# Altium PCB PCB-CL_BB_01.PcbDoc
Units mil, origin at the board's own origin, x right, y up, seen from the top; angles counter-clockwise.
Board outline 3925 x 2245 mil, 2 copper layers (Top Layer, Bottom Layer), stack 42.17 mil thick; 49 components, 23 nets, 122 pads, 40 vias.
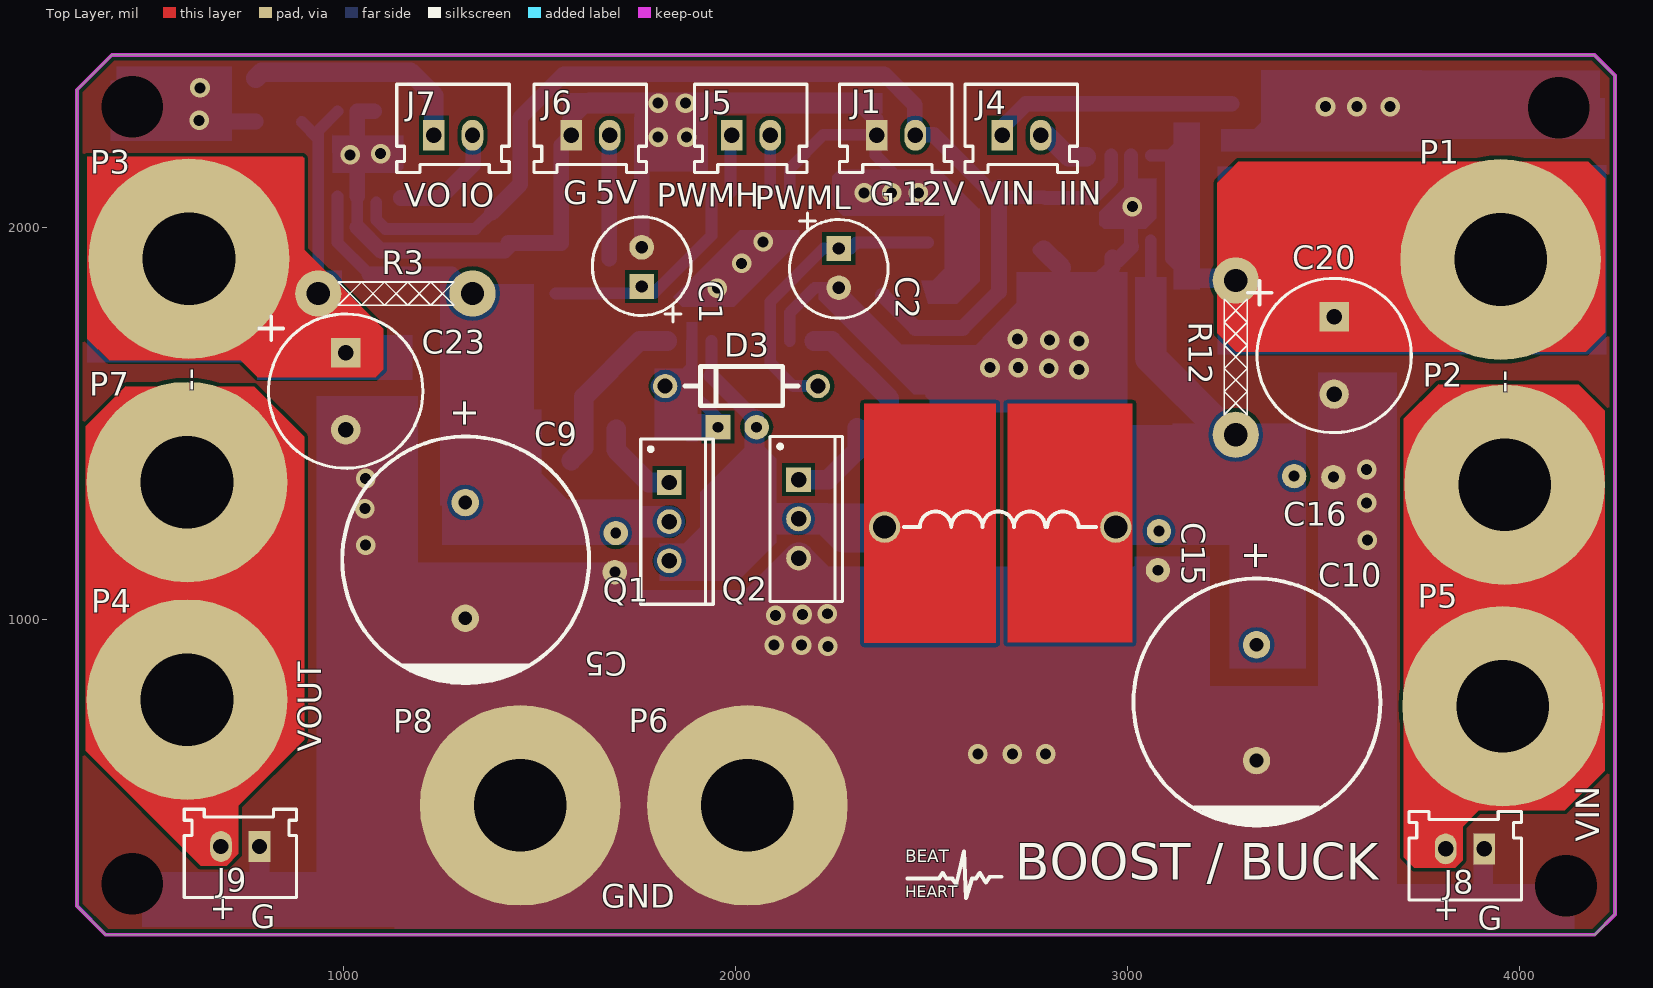
[diagram p0: Top Layer view]
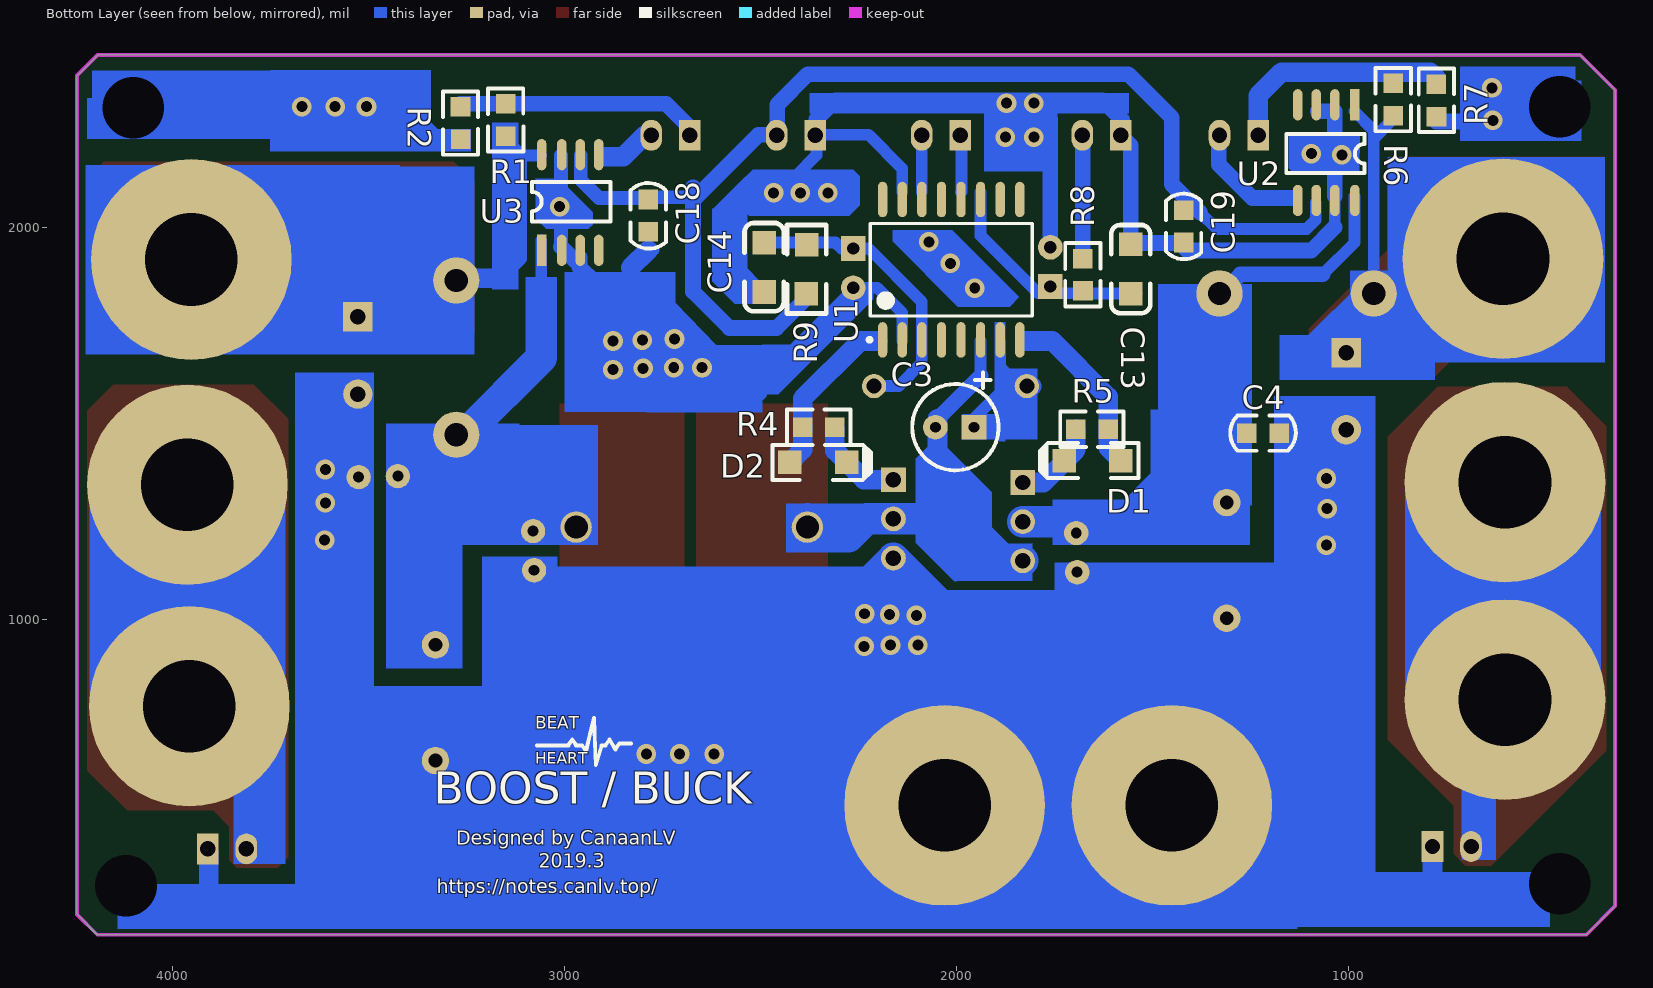
[diagram p1: Bottom Layer view, seen from below]
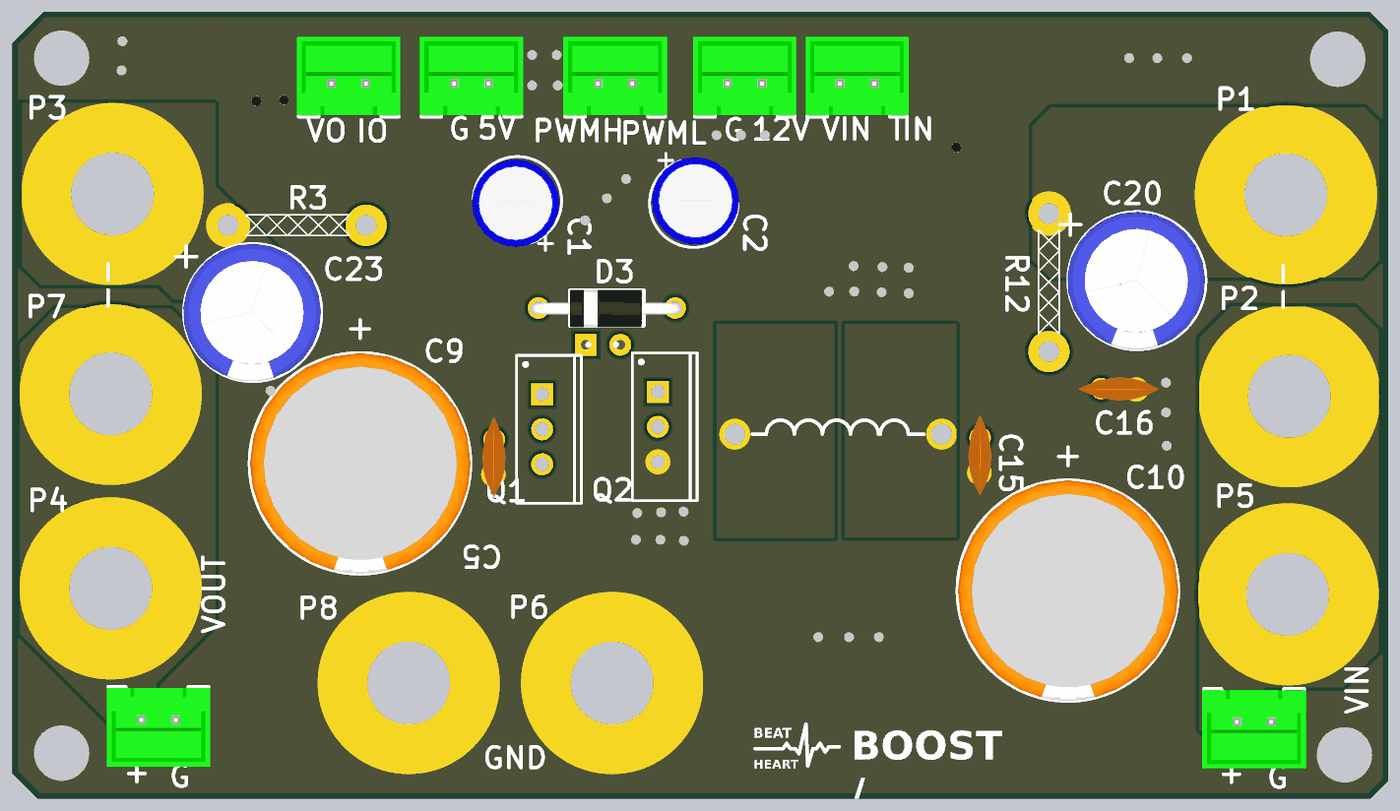
[diagram p2: 3D render of the assembled board from above, using the file's embedded part models]
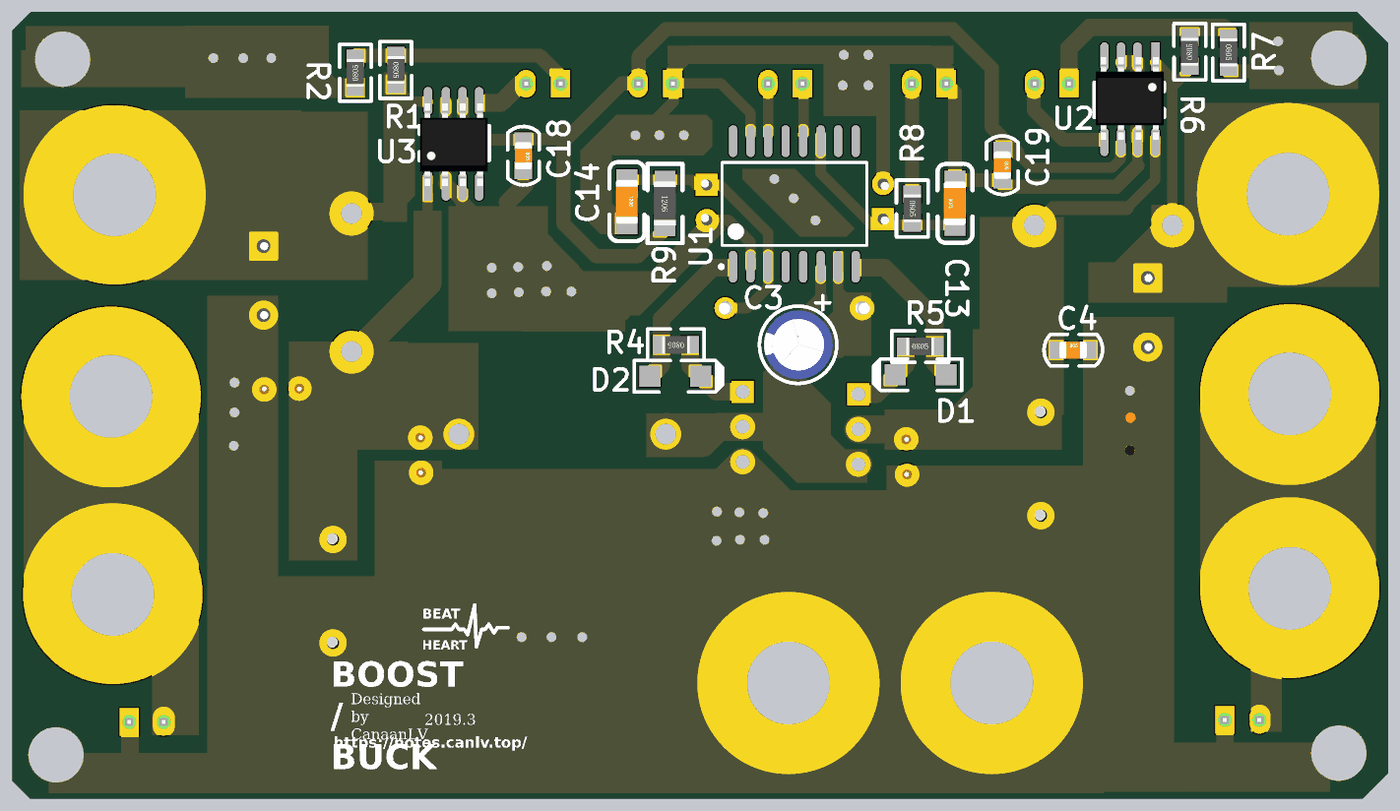
[diagram p3: 3D render of the assembled board from below, using the file's embedded part models]

## Layer stack, top to bottom
Top Solder: solder mask 0.4, Solder Resist, Dk 3.5
Top Layer: signal copper 1.4
Dielectric 1: dielectric 39.3701, FR-4, Dk 4.8
Bottom Layer: signal copper 1.4
Bottom Solder: solder mask 0.4, Solder Resist, Dk 3.5

## Board outline
319,268 392,195 4192,195 4244,247 4244,2387 4191,2440 408,2440 319,2351

## Design rules (kind name [scope] priority, off if disabled: settings)
Clearance [All] p1: gap=10
PlaneConnect [All] p1: planeconnectstyle=Direct reliefexpansion=20 reliefentries=4 reliefconductorwidth=10 reliefairgap=10
PolygonConnect [All] p1: connectstyle=Direct reliefconductorwidth=10 reliefentries=4 polygonreliefangle="90 Angle" airgapwidth=10
RoomDefinition Sheet-CL_BB_01 [InComponentClass('Sheet2')] p1: confinementstyle=ConfineIn formatcopy=TRUE lockcomponents=FALSE outline 283,160 4268,160 4268,2465 283,2465
RoutingVias [All] p1: holewidth=28 width=50 viastyle="Through Hole" minholewidth=28 minwidth=50 maxholewidth=28 maxwidth=50
SolderMaskExpansion [All] p1: expansion=4
Width [All] p1: maxlimit=1000 minlimit=10 preferedwidth=50
29 further rules are at their usual default settings.

## Components (designator, comment, footprint, x,y, rotation, side; value= is the part's Value field where it differs from the comment)
C1 "100uF" CZ0.65/25V100U 1760,1899 r90 top
C2 "100uF" CZ0.65/25V100U 2263,1896 r270 top
C3 "10uF" CZ0.50/25V4.7U 1955,1490 r180 bottom
C4 "uF" C0805 1265,1475 r180 bottom
C5 "uF" C0.254 1694,1170 r270 top
C9 "uF" CZ16X25 1310,1150 r90 top
C10 "uF" CZ16X25 3329,787 r90 top
C13 "0.1uF" C1206 1555,1831 r90 bottom
C14 "0.1uF" C1206 2490.54,1961 r270 bottom
C15 "uF" C0.254 3080,1175 r270 top
C16 "uF" C0.254 3475,1365 r0 top
C18 "0.1uF" C0805 2786,2077 r270 bottom
C19 "0.1uF" C0805 1420,2050 r270 bottom
C20 "470uF" CZ1.00/35V470uF 3527,1673 r180 top
C23 "470uF" CZ1.00/35V470uF 1005,1582 r180 top
D1 "0805D" 0805D 1650,1405 r0 bottom
D2 "0805D" 0805D 2355,1400 r180 bottom
D3 "DO-41" DO-41-2 2015,1595 r180 top
J1 "SIP-2" 2.54XH接插件2P 2360,2235 r0 top
J4 "SIP-2" 2.54XH接插件2P 2680,2235 r0 top
J5 "SIP-2" 2.54XH接插件2P 1990,2235 r0 top
J6 "SIP-2" 2.54XH接插件2P 1580,2235 r0 top
J7 "SIP-2" 2.54XH接插件2P 1230,2235 r0 top
J8 "SIP-2" 2.54XH接插件2P 3910,414 r180 top
J9 "SIP-2" 2.54XH接插件2P 785,420 r180 top
P1 "电流检测点" 接头孔6妈妈 3952,1918 r0 top
P2 "电流检测点" 接头孔6妈妈 3962,1343 r0 top
P3 "电流检测点" 接头孔6妈妈 605,1920 r0 top
P4 "电流检测点" 接头孔6妈妈 600,795 r0 top
P5 "输入正" 接头孔6妈妈 3957,778 r0 top
P6 "输入地" 接头孔6妈妈 2030,525 r0 top
P7 "输出正" 接头孔6妈妈 600,1350 r0 top
P8 "输出地" 接头孔6妈妈 1450,525 r0 top
Q1 "IRF540N" TO-220AB 1830.51,1248.98 r270 top
Q2 "IRF540N" TO-220AB 2160.51,1255.98 r270 top
R1 "R贴片电阻" R0805 3150,2315 r270 bottom
R2 "R贴片电阻" R0805 3265,2225 r90 bottom
R3 "20m" RES10 1301,1831 r180 top
R4 "R贴片电阻" R0805 2310,1490 r0 bottom
R5 "R贴片电阻" R0805 1695,1485 r180 bottom
R6 "R贴片电阻" R0805 885,2285 r90 bottom
R7 "R贴片电阻" R0805 775,2365 r270 bottom
R8 "R贴片电阻" R0805 1677,1920 r270 bottom
R9 "R贴片电阻" R1206 2385,1885 r270 bottom
R12 "20m" RES10 3276,1837 r270 top
U1 "IR2110S" SOIC16_N 2013,1892 r90 bottom
U2 "INA282" SO-8N 1058,2188 r270 bottom
U3 "INA282" SO-8N 2983,2066 r90 bottom
? "L" L_15mm 2380,1235 r0 top

## Footprints (in the part's own frame and the unit in brackets; to place one, negate y for a bottom-side part, rotate by r counter-clockwise, add the part's x,y. Pads: shape width x height; smd on the part's side, far side on the other; paste and mask are expansions set on the pad)
2.54XH接插件2P [mm]
  rect 1.4x2 hole 1: 1(0,0)
  oval 1.4x2 hole 1: 2(2.5,0)
  silkscreen extent -2.41,-2.41 4.88,3.3, body extent -2.51,-2.3 4.99,3.4, height 7
0805D [mil]
  rect 60x60 smd: A(-70,0) K(75,0)
  silkscreen extent -114,-45 137,45, body extent -60,-29 70,30, height 39
C0.254 [mil]
  round 62 hole 28: 1(-50,0) 2(50,-2.5)
  body extent -115,-34 115,33, height 233
C0805 [mil]
  rect 50x50 smd: 1(6,0) 2(88.7,-0.1)
  silkscreen extent -36,-45 131,45, body extent 8,-25 87,25, height 30
C1206 [mil] "3216/A型"
  rect 60x60 smd: 1(0,0) 2(126,0)
  silkscreen extent -50,-50 175,50, body extent 0,-31 126,32, height 39
CZ0.50/25V4.7U [mm]
  rect 1.6x1.6 hole 0.7: 1(0,0)
  round 1.6 hole 0.7: 2(-2.5,0)
  silkscreen extent -4,-2.8 1.6,3.56, body extent -3.68,-2.5 1.32,2.5, height 7.3
CZ0.65/25V100U [mm]
  rect 1.6x1.6 hole 0.8: 1(-1.27,0)
  round 1.6 hole 0.8: 2(1.27,0)
  silkscreen extent -3.56,-3.2 3.25,3.2, body extent -3.3,-3.05 3.05,3.3, height 13.03
CZ1.00/35V470uF [mm]
  rect 1.905x1.905 hole 1: 1(0,-2.5)
  round 1.905 hole 1: 2(0,2.5)
  silkscreen extent -5,-5 5.59,5, body extent -4.95,-5 5.03,5, height 16.8
CZ16X25 [mil]
  round 70 hole 35: 1(147.64,0) 2(-147.64,0)
  silkscreen extent -313,-316 316,314, body extent -313,-317 317,313, height 984
DO-41-2 [mil]
  round 62 hole 38: A(-195,0) K(195,0)
  silkscreen extent -145,-50 145,50, body extent -215,-52 219,55, height 107
L_15mm [mil] "12.7mm"
  round 80 hole 59.06: 1(0,0) 2(590,0)
  silkscreen extent 50,0 540,40
R0805 [mil] "1/8W"
  rect 50x50 smd: 1(0,0) 2(82.3,0.2)
  silkscreen extent -40,-45 122,45, body extent 1,-24 80,25, height 22
R1206 [mil] "1/4W"
  rect 60x60 smd: 1(-71,3) 2(55,2)
  silkscreen extent -121,-47 105,53, body extent -71,-29 55,33, height 24
RES10 [mm]
  round 3 hole 1.5: 1(-0.7,0) 2(9.3,0)
  silkscreen extent 0.51,-0.75 8.01,0.75, body extent -2.06,-1.02 10.69,0.98, height 16
SO-8N [mil]
  rect 80x24 smd: 1(-124.68,75)
  oval 80x24 smd: 2(-124.68,23.82) 3(-124.68,-23.42) 4(-124.68,-70.67) 5(119.41,-70.67) 6(119.41,-23.42) 7(119.41,23.82) 8(119.41,75)
  silkscreen extent -51,-100 49,100, body extent -123,-95 113,98, height 63
SOIC16_N [mm] "SOIC, 16-Leads, Body 10.3x7.5mm, Pitch 1.27mm, IPC Medium Density"
  oval 2.3x0.6 smd: 1(-4.55,4.445) 2(-4.55,3.175) 3(-4.55,1.905) 4(-4.55,0.635) 5(-4.55,-0.635) 6(-4.55,-1.905) 7(-4.55,-3.175) 8(-4.55,-4.445) 9(4.55,-4.445) 10(4.55,-3.175) 11(4.55,-1.905) 12(4.55,-0.635) 13(4.55,0.635) 14(4.55,1.905) 15(4.55,3.175) 16(4.55,4.445)
  silkscreen extent -4.67,-5.25 3,5.42, body extent -3.75,-5.15 3.75,5.15, height 2.65
TO-220AB [mm] "TO, Thru-Hole, Vertical, Heatsink Mounted; 3 In-Line Leads; Pitch 2.54 mm"
  rect 1.6x1.6 hole 1: 1(-2.54,0)
  round 1.6 hole 1: 2(0,0) 3(2.54,0)
  silkscreen extent -5.35,-1.85 5.35,2.85, body extent -5.4,-1.9 5.4,2.9, height 19.3
接头孔6妈妈 [mm]
  round 13 hole 6: 1(0,0)

## Part data
C1 C2 C3 C9 C10 C20 C23: library part C直插电容
C4 C13 C14 C18 C19: library part C贴片电容
C5 C15 C16: library part C直插无极性
P1 P2 P3 P4 P5 P6 P7 P8: library part SIP1, "Variable Resistor"
Q1 Q2: "HEXFET Power MOSFET"
R3 R12: library part R直插电阻
U1: "High and Low Side Driver"

## Free pads (board coordinates)
  round 0 hole 157.48: 6(4119,320) 7(4100,2305) 8(460,2308) 9(460,325)

## Via types
v1: diameter 50, hole 28, Top Layer to Bottom Layer, tented both sides, 40 vias

## Nets (pads, with @x,y where several pads share a name; then routed paths per layer and width w, separated by ;. In a path a pad name is that pad's centre, name@x,y a point inside that pad or via, vN(x,y) a via of type N, cw(c..) or ccw(c..) an arc to the next point about the centre after c; other vN are vias at no path point)
GND: C1.2 C2.2 C4.2 C5.2 C9.2 C10.2 C13.2 C14.2 C15.2 C16.2 C18.2 C19.2 C20.2 C23.2 J1.1 J6.1 J8.1 J9.1 P6.1 P8.1 pad.6 pad.7 pad.8 pad.9 Q2.3 R2.1 R7.2 U1.2 U1.15 U2.2 U2.3 U2.7 U3.2 U3.3 U3.7 | length 11279.8
  Bottom Layer w30: 1034.39,2000.61 U2.7@1034.39,2079.47 ; U1.2@2138,1710 U1.2 2138,1782 2202,1846 C2.2 ; U1.15@2138,2090 2138,2150 2224,2236 2357,2236 2357,2184 2409,2132 ; 2497.57,1575 2583,1575 2869,1861 2831,1861 ; C14.2@2502,1828 C14.2@2502,1840 ; 2621,1119 2625,1115 ; 2773,1942 2786,1942
  Bottom Layer w35: U3.2@3008.61,1950.61 U3.7@3008.61,2183.53
  Bottom Layer w40: 450,2245 475,2270 R7.2@775,2270 ; 585,320 785,320 1345,320 1710,685 ; 1034.39,2000.61 1094,1941 1411,1941 C19.2@1420,1950 ; U2.7@1034.39,2079.47 1034.39,2296 U2.3@1077,2296 ; C19.2@1420,1960 1555,1960 1555,2209 1577,2231 1577,2274 1627,2324 v1@1807,2324 ; C1.2 1760,2277 v1@1807,2324 ; J1.1@2357,2236 2357,2276 2309,2324 v1@1807,2324 ; 2831,1861 2924,1861 2961.5,1898.5 U3.3@2961.5,1923.5 ; U3.3@2971.5,1913.5 U3.2@3008.61,1950.61 ; R2.1 3325,2225 3380,2280
  Bottom Layer w50: 785,320 J9.1@785,415 ; C5.2@1685,1110 1385,1110 1385,1010 1710,685 ; P6.1@2200,690 2405,485 3120,485 3305,300 3715,300 ; 2786,1942 2831,1897 ; 3705,290 4085,290 ; J8.1@3908,405 3908,292 3910,290
  Bottom Layer w80: 1710,685 1710,705.46 Q2.3 ; 2160.51,965.51 Q2.3 ; P6.1@2200,690 2271.49,761.49 ; 3035,865 2375,865 2271.49,761.49 ; Q2.3 2271.49,1045 2271.49,761.49
  other v1: 2618,656 2706,656 2791,656 2235,931 2098,934 2168,934 2102,1010 2170,1012 2234,1014 1056,1189 3612,1202 1054,1282 3610,1297 1056,1359 3610,1382 2876,1637 2799,1640 2649,1642 2721,1642 2876,1710 2801,1712 2719,1715 1953,1845 2015,1908 2070,1963 3012,2053 2328,2088 2398,2088 2466,2088 1016,2185 1094,2188 1802,2230 1875,2230 631,2273 3505,2308 3585,2308 3670,2308 1802,2317 1872,2317 633,2356
IIN_TEST: J4.2 U3.5 | length 122.8
  Bottom Layer w50: J4.2@2795,2235 2850,2180 2895,2180
IOUT_TEST: J7.2 U2.5 | length 290.2
  Bottom Layer w40: 1145,2075 1245,2075 1330,2160 J7.2@1330,2230
Net_2: ?.2 C10.1 C15.1 C16.1 R12.2 U3.1 | length 774.8
  Bottom Layer w30: 3059,1720 U3.1@3059,1967
  Bottom Layer w80: ?.2@2975,1250 3180,1250 ; 3059,1720 3059,1667.3 R12.2@3250,1476.3
NetC1_1: C1.1 C13.1 R8.2 U1.11 | length 570.6
  Bottom Layer w30: C13.1@1540,1831 1659,1831 1660,1832 1791.42,1832 1938,1978.58 U1.11@1938,2090
NetC2_1: C2.1 C14.1 D3.A R9.1 U1.3 | length 776.4
  Bottom Layer w30: D3.A@2218.91,1595 2147,1595 2088,1654 2088,1810 2224,1946 2293.43,1946 2308.43,1961 C14.1
NetC3_1: C3.1 D3.K U1.7 | length 366.4
  Bottom Layer w30: D3.K 1872,1595 1958,1509 C3.1@1958,1484 ; D3.K@1840,1595 1888,1643 U1.7@1888,1710
  Bottom Layer w50: D3.K@1807.09,1595 D3.K@1840,1595
NetC4_1: C4.1 C5.1 C9.1 Q1.2 R3.1 U2.8 | length 1969.9
  Bottom Layer w30: U2.8@984,2079.47 984,1961 1065,1880
  Bottom Layer w40: 1065,1880 1275,1880 1415,1740 1415,1645
  Bottom Layer w80: 1380,1365 1415,1365 ; 1385,1245 1415,1275 1415,1365 ; 1415,1645 1415,1365 ; 1670,1250 C5.1@1680,1240 ; 1680,1248.98 Q1.2 ; C5.1@1710,1240 C5.1@1680,1240 ; 1415,1365 1455,1365 1580,1240 C5.1@1680,1240
  Bottom Layer w100: 1340,1240 1600,1240 ; C5.1@1680,1240 C5.1@1695,1240
NetC20_1: C20.1 P1.1 R1.2 R12.1 U3.8 | length 1289.4
  Bottom Layer w30: U3.8@3059,2183.53 3108.53,2183.53 3150,2225 3110,2185 3110,1920 3160,1870
  Bottom Layer w50: 3160,1870 P1.1@3730,1870 ; P1.1@3708,1868 P1.1@3753,1913 ; P1.1@3847,1908 P1.1@3967,1908
  Bottom Layer w80: P1.1@3942,1883 P1.1@3967,1908
NetC23_1: C23.1 P3.1 R3.2 R6.1 U2.1 | length 841.7
  Bottom Layer w30: P3.1@700,1890 P3.1@805,1890 ; R6.1@892.55,2269 935,2226.55 ; R3.2@935,1830 935,2226.55 ; R3.2@941.3,1828.7 R3.2@941.3,1830 ; U2.1@984,2296 935,2247 935,2226.55
  Bottom Layer w80: R3.2@941.3,1828.7 1075,1695
NetD1_A: D1.A R5.2 U1.8 | length 447.5
  Bottom Layer w50: D1.A 1612.7,1437.7 R5.2 1612.7,1567.7 1755,1710 1825,1710
NetD2_A: D2.A R4.2 U1.1 | length 429.6
  Bottom Layer w50: 2200,1710 2245,1710 2392.3,1562.7 R4.2 2392.3,1432.7 D2.A
PWM_H: D1.K Q1.1 R5.1 | length 222.9
  Bottom Layer w50: R5.1 1695,1432 1778.02,1348.98 Q1.1
PWM_H1: J5.1 U1.12 | length 146.4
  Bottom Layer w30: J5.1@1987,2236 1987,2091 U1.12@1988,2090
PWM_L: D2.K Q2.1 R4.1 | length 239.1
  Bottom Layer w50: Q2.1 2235.98,1355.98 2310,1430 R4.1@2310,1489
PWM_L1: J5.2 U1.14 | length 146.4
  Bottom Layer w30: J5.2@2087,2236 2088,2235 U1.14@2088,2090
VCC_5V: J6.2 R8.1 | length 311
  Bottom Layer w40: R8.1 J6.2@1677,2231
VCC_12V: C18.1 C19.1 J1.2 R9.2 U2.6 U3.6 | length 3076.8
  Bottom Layer w30: U2.6@1083,2063.59 1083,2019 1106,1996 1336,1996 1377.5,2037.5
  Bottom Layer w35: 2675,2077 C18.1@2786,2077 ; C18.1@2790,2075 2912,2075 2958.21,2121.21 U3.6@2958.21,2183.53
  Bottom Layer w40: 1377.5,2037.5 1450,2110 1450,2280 1561,2391 2379,2391 2457,2313 2457,2236 2505,2236 2669.5,2071.5 ; R9.2@2376,1826 2459,1743 2579,1743 2672,1836 2672,2102
VCC_IN: J8.2 P2.1 P5.1 | length 900.1
  Bottom Layer w60: J8.2@3813,420 P5.1@3813,653 ; P5.1@3857,778 P5.1
  Bottom Layer w500: P5.1 3962,783 P2.1
VIN_TEST: J4.1 R1.1 R2.2 | length 613.6
  Bottom Layer w40: J4.1@2677.5,2252.5 2740,2315 R2.2@3265.2,2315
VOUT: J9.2 P4.1 P7.1 | length 945.2
  Bottom Layer w50: P4.1 685,710 J9.2@685,415
  Bottom Layer w500: P4.1@605,795 P7.1@605,1325
VOUT_TEST: J7.1 R6.2 R7.1 | length 592.5
  Bottom Layer w50: R7.1@775,2380 791,2396 1170,2396 1230,2336 J7.1@1230,2230
VS: ?.1 C3.2 Q1.3 Q2.2 U1.6 | length 1124.8
  Bottom Layer w30: 1938,1621 U1.6@1938,1710
  Bottom Layer w40: 1938,1621 C3.2@2048,1511
  Bottom Layer w50: 2048,1253 C3.2@2048,1511
  Bottom Layer w80: Q1.3 1943.98,1148.98 ; 2080.98,1255.98 Q2.2 2229.02,1255.98 2275,1210 2355,1210 2379.02,1234.02 2379.02,1255.98 ?.1@2385,1250
  Bottom Layer w90: 2073,1248 2080.98,1255.98
  Bottom Layer w110: 1948.98,1153.98 2048,1253
pads on no net: U1.4 U1.5 U1.9 U1.10 U1.13 U1.16 U2.4 U3.4

## Polygon pours and split planes (outlines as drawn)
GND on Top Layer "Top Layer-GND" (solid, remove dead copper, pour order 4): 408,2440 319,2351 319,268 392,195 4181,195 4192,195 4244,247 4244,2387 4191,2440

## Keep-outs
Keep-Out Layer:
  the board outline again, w10

## Other copper
Top Layer:
  rectangle net VS: 2328,939 2664,1550
  rectangle net Net_2: 2694,941 3012,1550
  region net NetC23_1: 346,2180 895,2180 899,2176 899,1943 1101,1741 1101,1638 1081,1618 780,1618 737,1661 401,1661 346,1716
  region net VOUT: 444,1595 341,1492 341,665 635,371 701,371 731,401 731,524 899,692 899,1466 772,1593 646,1593
  region net NetC20_1: 3282,2167 3229,2114 3229,1730 3277,1682 4169,1682 4219,1732 4219,2124 4176,2167
  region net VCC_IN: 3794,1600 3705,1511 3705,393 3732,366 3836,366 3855,385 3855,471 3896,512 4115,512 4217,614 4217,1532 4151,1598
Bottom Layer:
  rectangle net GND: 3370,2330 4206,2400
  rectangle net GND: 420,2375 715,2410
  rectangle net GND: 2495,1527 2790,1700
  rectangle net GND: 3370,2225 4218,2330
  rectangle net GND: 405,2220 715,2375
  rectangle net NetC23_1: 778,1610 1175,1725
  rectangle net GND: 930,625 1190,1570
  rectangle net NetC20_1: 3230,1675 3420,2155
  rectangle net GND: 3486,300 3687,1630
  rectangle net GND: 930,355 1205,625
  rectangle net GND: 3545,210 4140,325
  rectangle net GND: 485,215 1205,355
  rectangle net NetC23_1: 345,1655 900,2180
  rectangle net NetC23_1: 885,1610 995,1890
  rectangle net NetC4_1: 1245,1290 1505,1535
  rectangle net NetC4_1: 1245,1535 1485,1855
  rectangle net GND: 1130,210 1750,1145
  rectangle net NetC4_1: 1250,1190 1755,1306
  rectangle net GND: 1750,210 2425,1075
  rectangle net VS: 2270,1170 2435,1260
  rectangle net VS: 2225,1260 2435,1295
  rectangle net GND: 2225,1075 2425,1135
  rectangle net GND: 2425,210 3210,1135
  rectangle net GND: 3018,1135 3210,1160
  rectangle net Net_2: 3260,874 3455,1205
  rectangle net NetC20_1: 3420,1675 4222,2159
  rectangle net Net_2: 2914,1190 3115,1495
  rectangle net Net_2: 3115,1190 3455,1500
  rectangle net GND: 3170,210 3545,830
  rectangle net NetC3_1: 1874,1453 1903,1758
  rectangle net NetC3_1: 1887,1458 1985,1524
  rectangle net NetC3_1: 1793,1458 1887,1640
  rectangle net VS: 1805,1097 1999,1192
  rectangle net VS: 1909,1175 2033,1298
  rectangle net Net_2: 3019,1709 3099,1873
  rectangle net NetC20_1: 3117,1841 3185,2267
  rectangle net GND: 2716,1529 3000,1886
  rectangle net GND: 1742,2142 1930,2342
  rectangle net GND: 1559,2291 2375,2343
  rectangle net GND: 3238,2194 3395,2251
  rectangle net GND: 3341,2194 3751,2401
  rectangle net VCC_IN: 3712,376 3845,814
  rectangle net VOUT: 623,386 711,661
  region net GND: 972,2139 1136,2139 1138,2137 1152,2151 1152,2234 972,2234 970,2236
  region net GND: 1841,1823 2010,1992 2162,1992 2162,1964 1996,1798 1864,1798 1841,1821
  region net GND: 2263,2147 2520,2147 2555,2112 2555,2057 2528,2030 2273,2030 2247,2056 2247,2131
  region net GND: 2290,1862 2290,1834 2424,1700 2495,1700 2495,1584 2485,1574 2454,1574 2212,1816 2212,1860
  region net GND: 2491,1805 2566,1805 2623,1862 2623,2047 2620,2047 2555,2112 2534,2091 2534,1895 2503,1864 2474,1864
  region net GND: 2991,2124 2991,2102 2928,2039 2928,2007 2939,1996 3046,1996 3073,2023 3073,2125
  region net GND: 2717,1807 2717,1803 2729,1699 2613,1699
  region net VS: 1805,1192 1867,1192 1912,1237 1909,1240 1909,1324 2024,1439 2074,1439 2103,1410 2103,1195 2005,1097 1999,1097

## Silkscreen, mask and mechanical layers (free items; w line width, h text height)
Top Overlay:
  lines w10: 2438,338 2518,338 2528,353 2538,338 2553,338 2563,323 2583,408 2588,288 2603,338 2613,338 2623,353 2638,328 2648,343 2678,343
  text "5V" at 1642,2060 h60
  text "G" at 1560,2059 h60
  text "VIN" at 2623,2058 h60
  text "IIN" at 2824,2058 h60
  text "12V" at 2424,2057 h60
  text "G" at 2343,2056 h60
  text "VO" at 1154,2053 h60
  text "PWMH" at 1799,2053 h60
  text "IO" at 1296,2052 h60
  text "PWML" at 2049,2046 h60
  text "--" at 635,1582 h60 r90
  text "--" at 3987,1577 h60 r90
  text "VOUT" at 942,662 h60 r90
  text "VIN" at 4203,432 h60 r90
  text "BEAT" at 2433,369 h55
  text "BOOST / BUCK" at 2713,305 h160
  text "HEART" at 2433,281 h50
  text "GND" at 1657,264 h60
  text "+" at 717,225 h60 r90
  text "+" at 3839,223 h60 r90
  text "G" at 763,211 h60
  text "G" at 3894,208 h60
Bottom Overlay:
  lines w10: 2830,683 2860,683 2870,668 2885,693 2895,678 2905,678 2920,628 2925,748 2945,663 2955,678 2970,678 2980,693 2990,678 3070,678
  text "BEAT" at 3075,709 h55
  text "HEART" at 3075,621 h50
  text "BOOST / BUCK" at 3334,503 h140
  text "Designed by CanaanLV" at 3276,413 h60
  text "2019.3" at 3066,354 h60
  text "https://notes.canlv.top/" at 3326,289 h60

## Text inside footprints (layer, text, board x,y; h text height)
C9: Top Overlay "+" at 1338,1485.64 h68.9 r90
C10: Top Overlay "+" at 3357,1122.64 h68.9 r90